# EAGLE board adc_dac (EAGLE 7.3.0), part 1 of 2
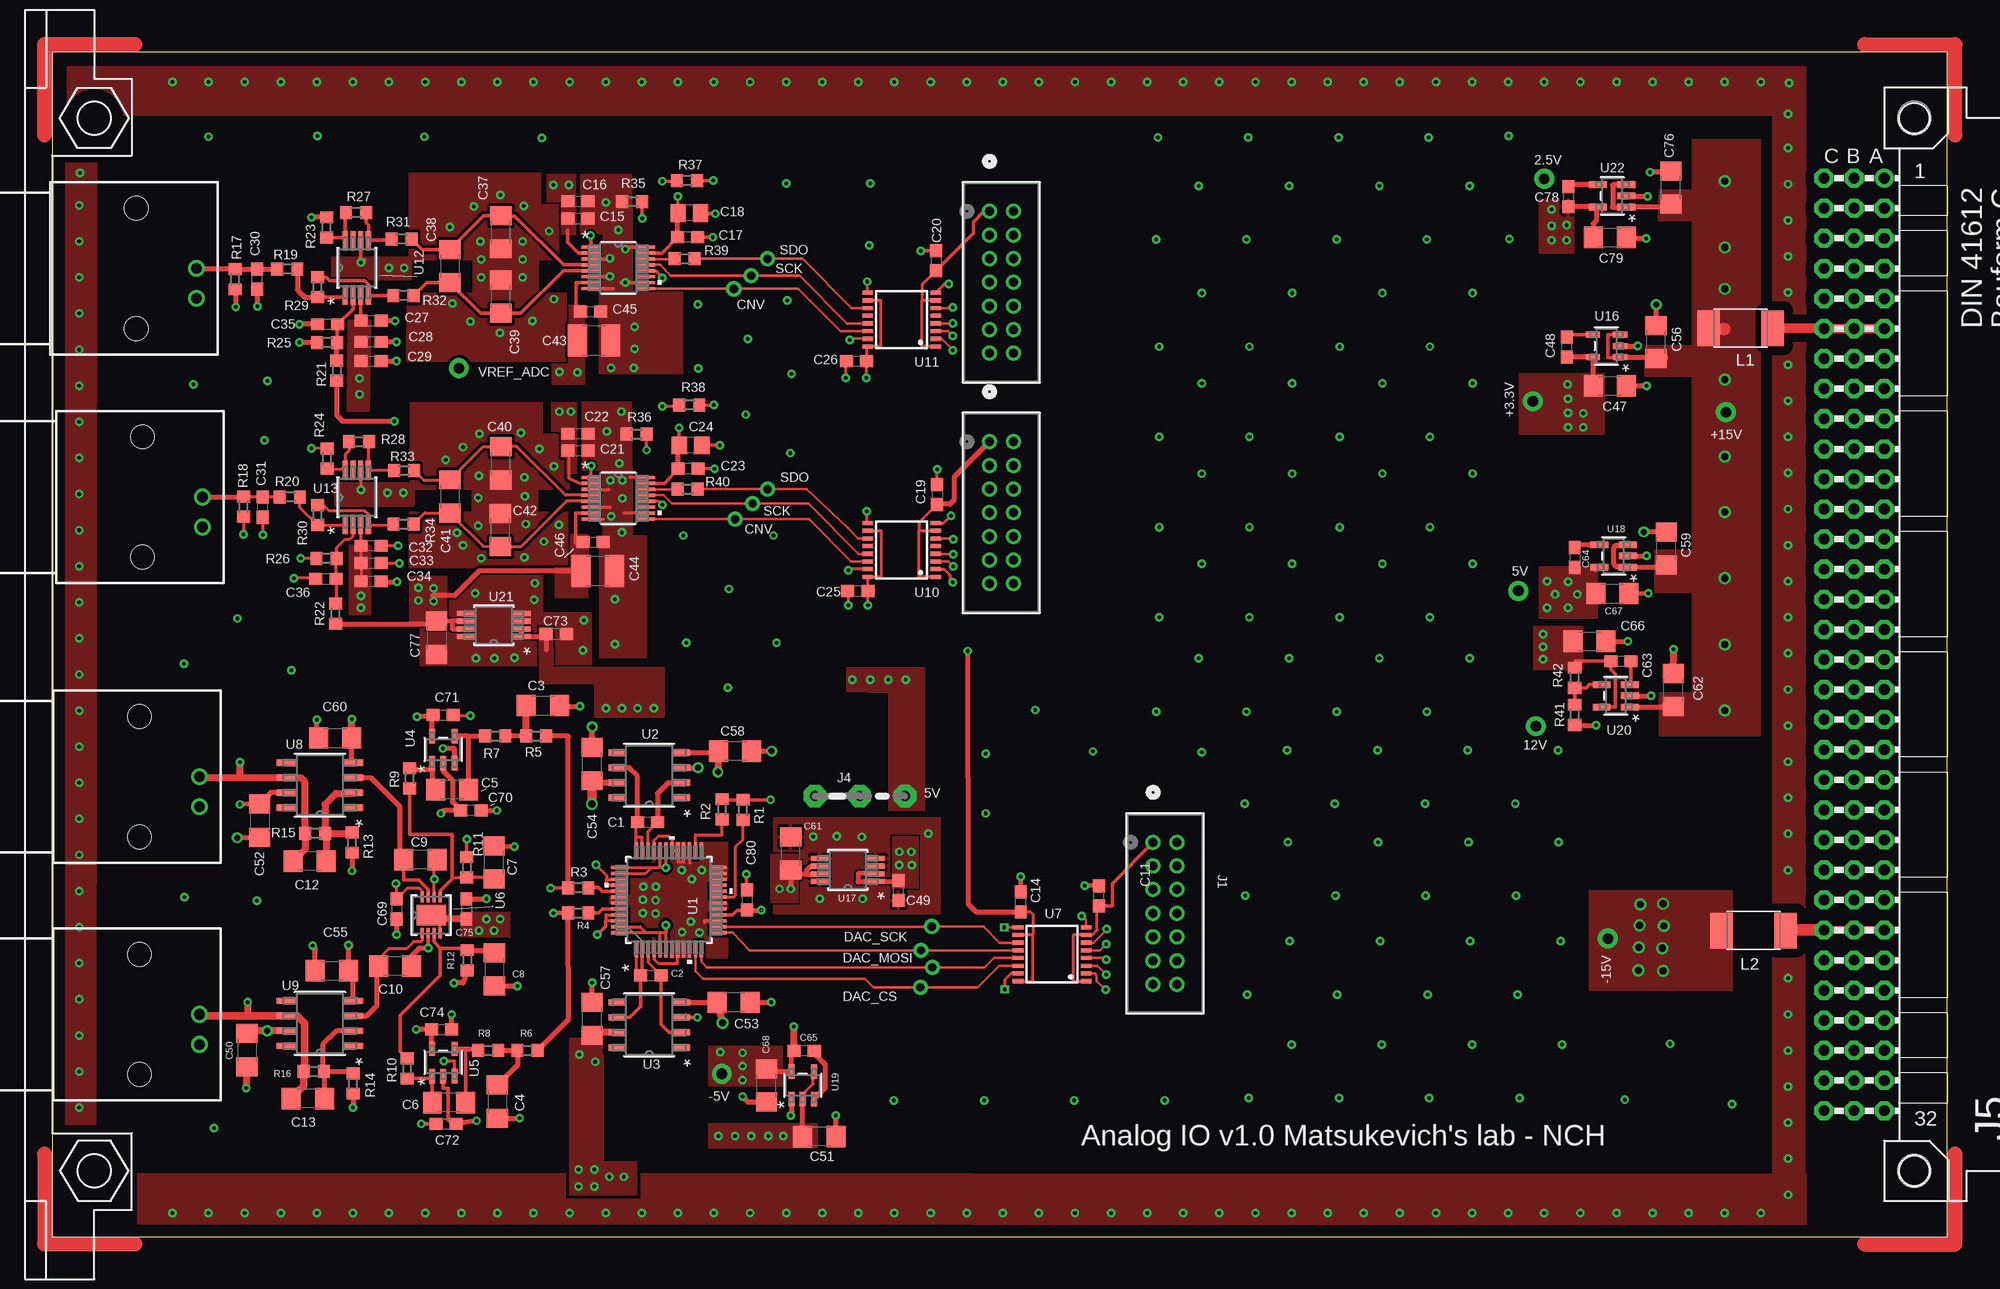
[diagram p0: board, top side]
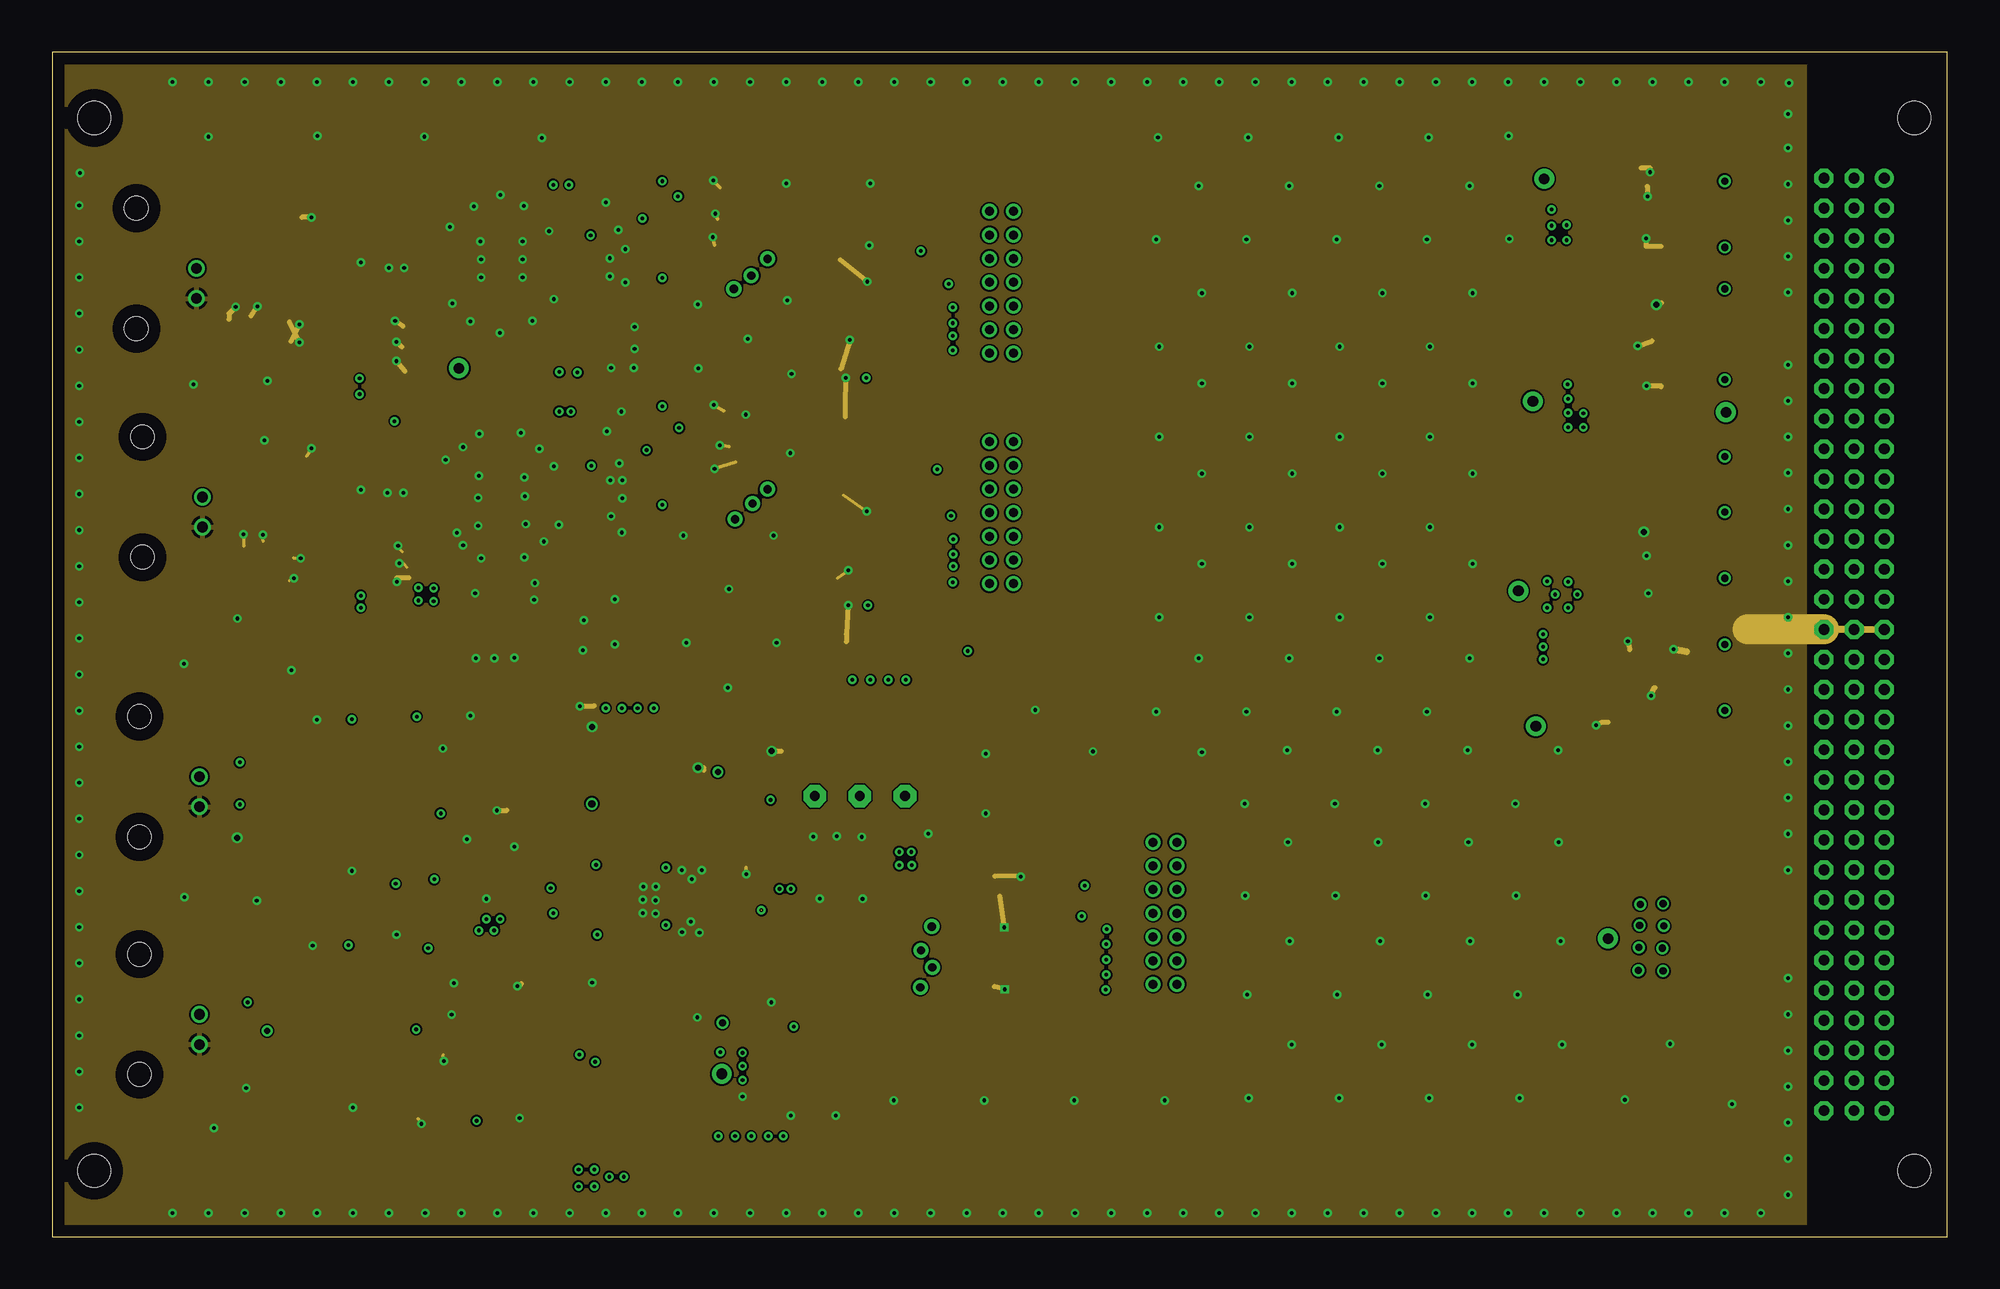
[diagram p1: board, inner layer GND]
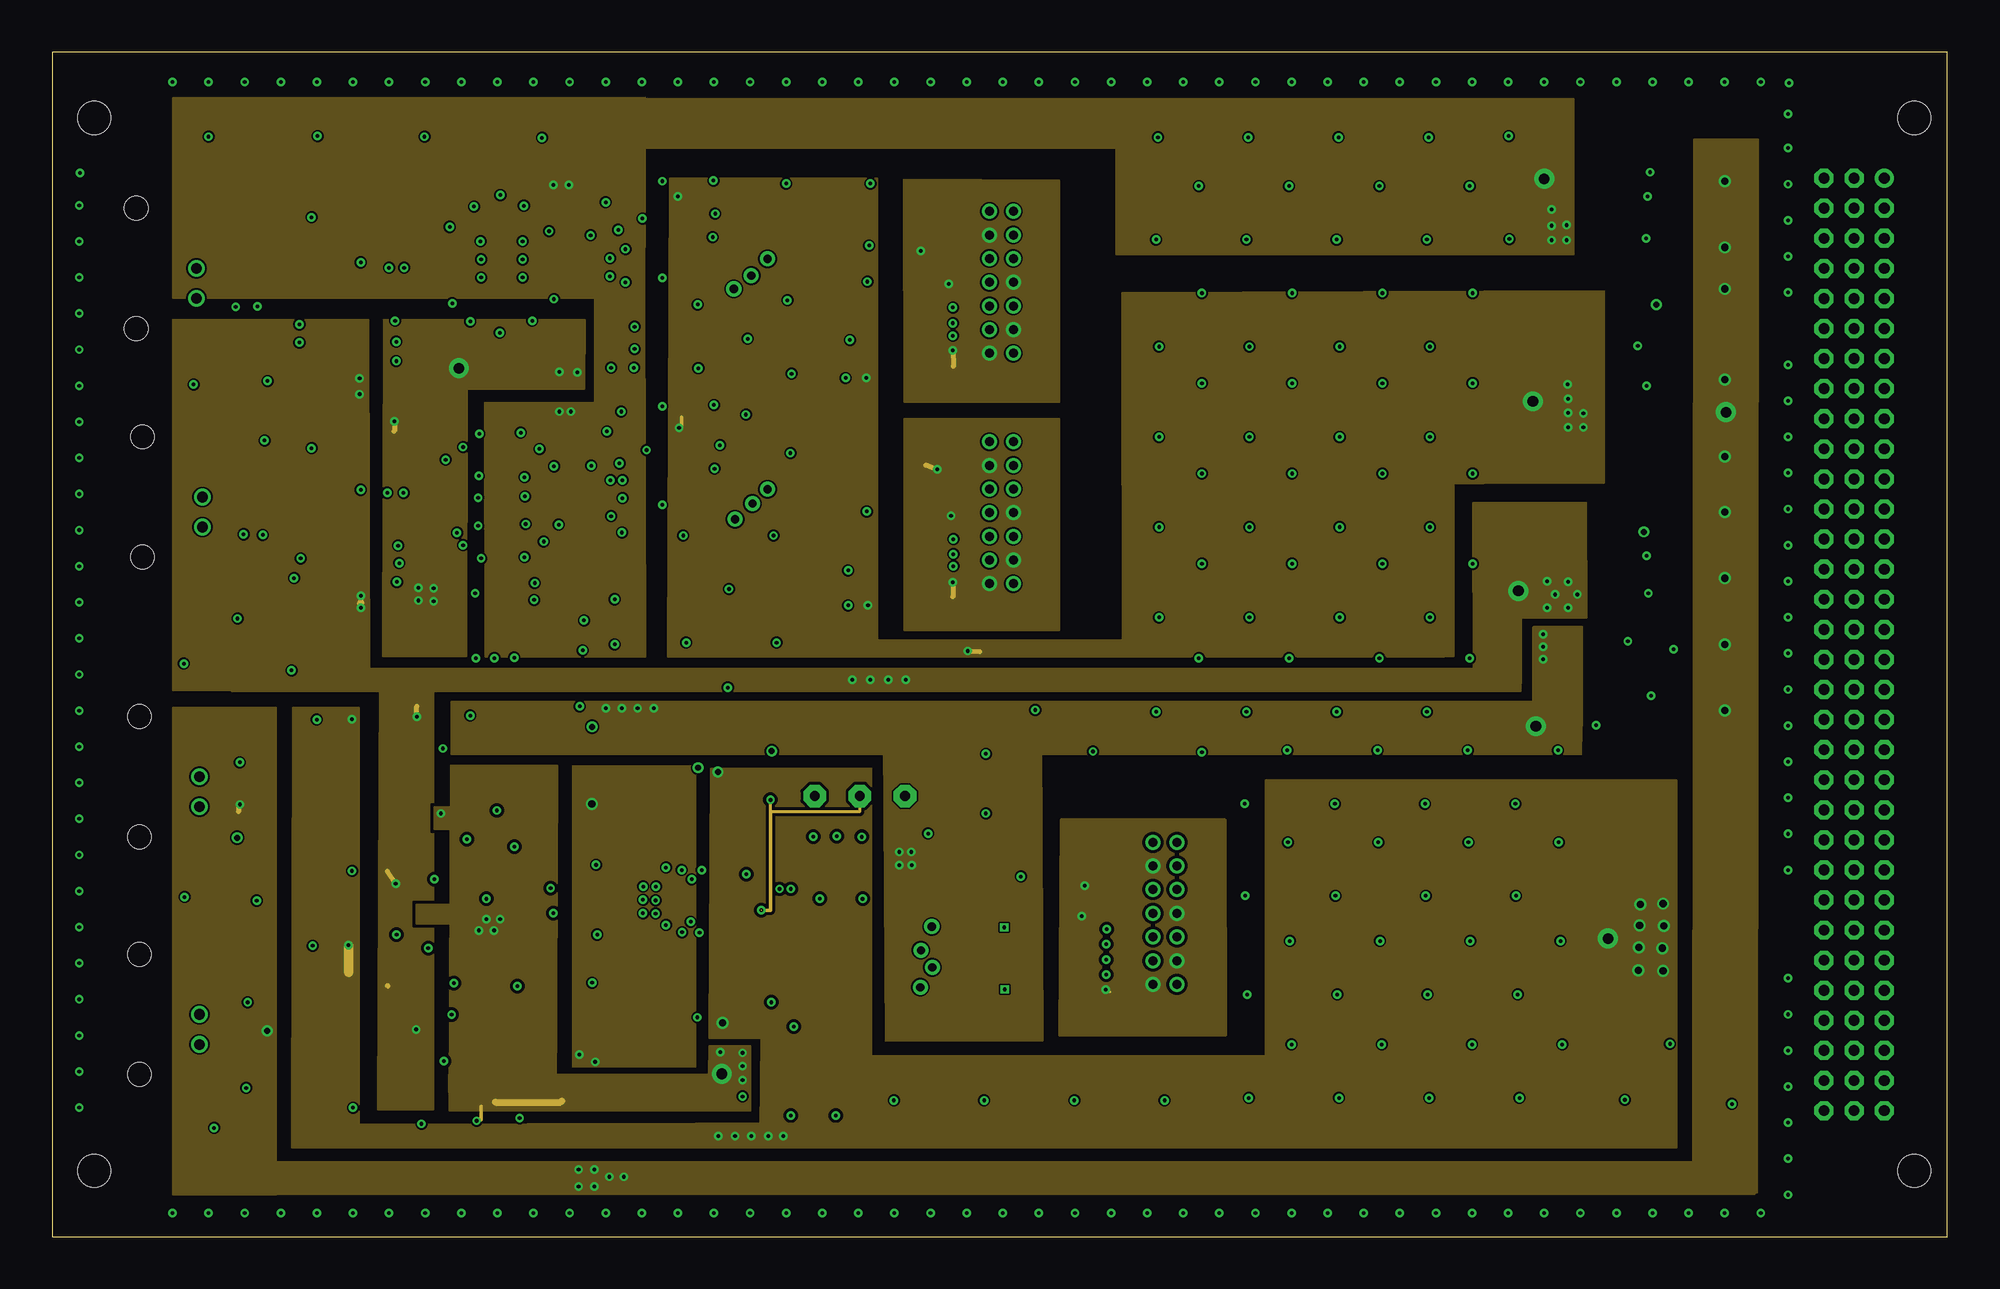
[diagram p2: board, inner layer PWR]
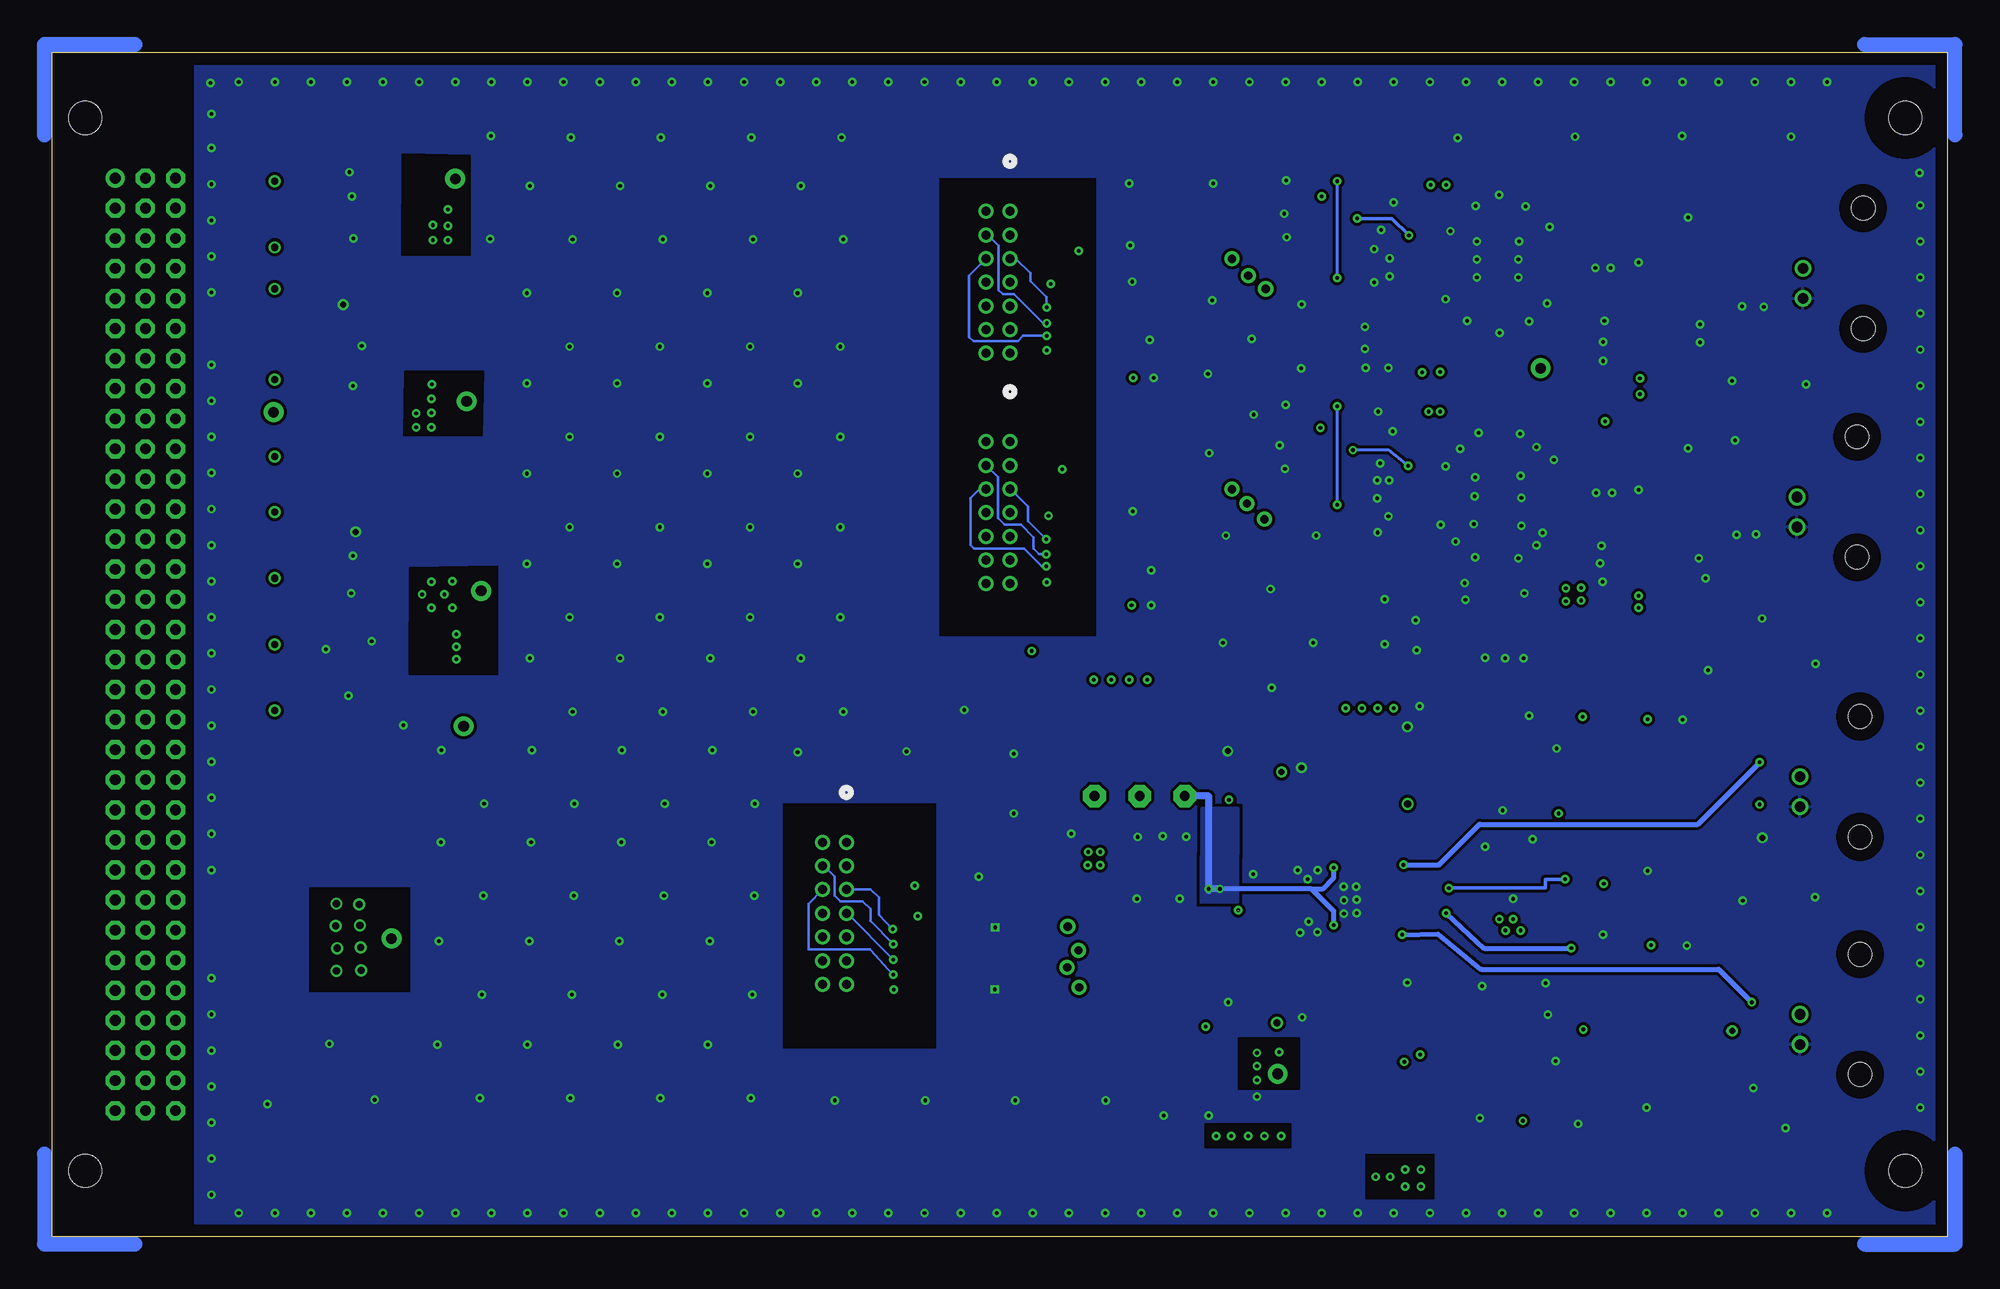
[diagram p3: board, bottom side, seen from below]

Size 160.02 x 100.03 mm. Coordinates in mm from the lower left corner, seen from the top.
Copper layers (1+2*15+16): Top 0.035mm / dielectric 0.10998125mm / GND 0.035mm / dielectric 1.206mm / PWR 0.035mm / dielectric 0.10998125mm / Bottom 0.035mm
Design rules "default *": minimum track width 6mil, minimum drill 8mil, track to track 6mil, track to pad 6mil, pad to pad 6mil, via to via 6mil, smd to smd 6mil, copper to edge 40mil, drill to drill 6mil, minimum pad ring 10mil, minimum via ring 8mil, stop-mask expansion 4mil, vias tented up to drill 0mil, thermal gap 10mil
Net classes: 0 default: drill 0.305 mm

## Footprints (pad centres in the part's own frame; a part is rotated, then mirrored left to right if it is on the bottom)
C0603 = smd 1.1 x 1: 1 -0.85,0; 2 0.85,0
C1206 = smd 1.6 x 1.8: 1 -1.4,0; 2 1.4,0
C0805 = smd 1.3 x 1.5: 1 -0.95,0; 2 0.95,0
C1210 = smd 1.6 x 2.7: 1 -1.4,0; 2 1.4,0
CONN_87831-1420_MOL = drill 0.762 pad 1.27: 1 0,0; 2 2.007,0; 3 3.988,0; 4 5.994,0; 5 8.001,0; 6 10.008,0; 7 11.989,0; 8 0,2.007; 9 2.007,2.007; 10 3.988,2.007; 11 5.994,2.007; 12 8.001,2.007; 13 10.008,2.007; 14 11.989,2.007
04C = drill 0.813 pad 1.905 octagon: 1 -1.905,0; 2 1.905,0; 3 5.715,0
VG96P = drill 0.914 pad 1.6: A1 154.94,39.37 | drill 0.914 pad 1.6 octagon: A2 154.94,36.83; A3 154.94,34.29; A4 154.94,31.75; A5 154.94,29.21; A6 154.94,26.67; A7 154.94,24.13; A8 154.94,21.59; A9 154.94,19.05; A10 154.94,16.51; A11 154.94,13.97; A12 154.94,11.43; A13 154.94,8.89; A14 154.94,6.35; A15 154.94,3.81; A16 154.94,1.27; A17 154.94,-1.27; A18 154.94,-3.81; A19 154.94,-6.35; A20 154.94,-8.89; A21 154.94,-11.43; A22 154.94,-13.97; A23 154.94,-16.51; A24 154.94,-19.05; A25 154.94,-21.59; A26 154.94,-24.13; A27 154.94,-26.67; A28 154.94,-29.21; A29 154.94,-31.75; A30 154.94,-34.29; A31 154.94,-36.83; A32 154.94,-39.37; B1 152.4,39.37; B2 152.4,36.83; B3 152.4,34.29; B4 152.4,31.75; B5 152.4,29.21; B6 152.4,26.67; B7 152.4,24.13; B8 152.4,21.59; B9 152.4,19.05; B10 152.4,16.51; B11 152.4,13.97; B12 152.4,11.43; B13 152.4,8.89; B14 152.4,6.35; B15 152.4,3.81; B16 152.4,1.27; B17 152.4,-1.27; B18 152.4,-3.81; B19 152.4,-6.35; B20 152.4,-8.89; B21 152.4,-11.43; B22 152.4,-13.97; B23 152.4,-16.51; B24 152.4,-19.05; B25 152.4,-21.59; B26 152.4,-24.13; B27 152.4,-26.67; B28 152.4,-29.21; B29 152.4,-31.75; B30 152.4,-34.29; B31 152.4,-36.83; B32 152.4,-39.37; C1 149.86,39.37; C2 149.86,36.83; C3 149.86,34.29; C4 149.86,31.75; C5 149.86,29.21; C6 149.86,26.67; C7 149.86,24.13; C8 149.86,21.59; C9 149.86,19.05; C10 149.86,16.51; C11 149.86,13.97; C12 149.86,11.43; C13 149.86,8.89; C14 149.86,6.35; C15 149.86,3.81; C16 149.86,1.27; C17 149.86,-1.27; C18 149.86,-3.81; C19 149.86,-6.35; C20 149.86,-8.89; C21 149.86,-11.43; C22 149.86,-13.97; C23 149.86,-16.51; C24 149.86,-19.05; C25 149.86,-21.59; C26 149.86,-24.13; C27 149.86,-26.67; C28 149.86,-29.21; C29 149.86,-31.75; C30 149.86,-34.29; C31 149.86,-36.83; C32 149.86,-39.37 | hole 2.794: 3.81,44.45; 3.81,-44.45; 157.48,44.45; 157.48,-44.45
WE-CBF_1812(W=7.3) = smd 1.9 x 3: 1 -2.7,0; 2 2.7,0
R0603 = smd 1 x 1.1: 1 -0.85,0; 2 0.85,0
LQFP-48_LX_LIT = smd 1.356 x 0.27: 1 -4.178,2.75; 2 -4.178,2.25; 3 -4.178,1.75; 4 -4.178,1.25; 5 -4.178,0.75; 6 -4.178,0.25; 7 -4.178,-0.25; 8 -4.178,-0.75; 9 -4.178,-1.25; 10 -4.178,-1.75; 11 -4.178,-2.25; 12 -4.178,-2.75; 25 4.178,-2.75; 26 4.178,-2.25; 27 4.178,-1.75; 28 4.178,-1.25; 29 4.178,-0.75; 30 4.178,-0.25; 31 4.178,0.25; 32 4.178,0.75; 33 4.178,1.25; 34 4.178,1.75; 35 4.178,2.25; 36 4.178,2.75 | smd 0.27 x 1.356: 13 -2.75,-4.178; 14 -2.25,-4.178; 15 -1.75,-4.178; 16 -1.25,-4.178; 17 -0.75,-4.178; 18 -0.25,-4.178; 19 0.25,-4.178; 20 0.75,-4.178; 21 1.25,-4.178; 22 1.75,-4.178; 23 2.25,-4.178; 24 2.75,-4.178; 37 2.75,4.178; 38 2.25,4.178; 39 1.75,4.178; 40 1.25,4.178; 41 0.75,4.178; 42 0.25,4.178; 43 -0.25,4.178; 44 -0.75,4.178; 45 -1.25,4.178; 46 -1.75,4.178; 47 -2.25,4.178; 48 -2.75,4.178
SO-8_S_LIT = smd 1.46 x 0.533: 1 -2.724,1.905; 2 -2.724,0.635; 3 -2.724,-0.635; 4 -2.724,-1.905; 5 2.724,-1.905; 6 2.724,-0.635; 7 2.724,0.635; 8 2.724,1.905
SOT-5_S_LIT = smd 1.211 x 0.501: 1 -1.15,0.95; 2 -1.15,0; 3 -1.15,-0.95; 4 1.15,-0.95; 5 1.15,0.95
DFN-8_DD_LIT-M = smd 0.889 x 0.254: 1 -1.511,0.75; 2 -1.511,0.25; 3 -1.511,-0.25; 4 -1.511,-0.75; 5 1.511,-0.75; 6 1.511,-0.25; 7 1.511,0.25; 8 1.511,0.75 | smd 1.753 x 2.489: 9 0,0
TSSOP16 = smd 0.9 x 0.35: 1 -2.875,2.275; 2 -2.875,1.625; 3 -2.875,0.975; 4 -2.875,0.325; 5 -2.875,-0.325; 6 -2.875,-0.975; 7 -2.875,-1.625; 8 -2.875,-2.275; 9 2.875,-2.275; 10 2.875,-1.625; 11 2.875,-0.975; 12 2.875,-0.325; 13 2.875,0.325; 14 2.875,0.975; 15 2.875,1.625; 16 2.875,2.275
SO-8_S_LIT-M = smd 1.664 x 0.533: 1 -2.826,1.905; 2 -2.826,0.635; 3 -2.826,-0.635; 4 -2.826,-1.905; 5 2.826,-1.905; 6 2.826,-0.635; 7 2.826,0.635; 8 2.826,1.905
MSOP-8_MS_LIT-M = smd 1.562 x 0.432: 1 -2.33,0.975; 2 -2.33,0.325; 3 -2.33,-0.325; 4 -2.33,-0.975; 5 2.33,-0.975; 6 2.33,-0.325; 7 2.33,0.325; 8 2.33,0.975
MSOP-16_MS_LIT-M = smd 1.537 x 0.279: 1 -2.318,1.751; 2 -2.318,1.251; 3 -2.318,0.751; 4 -2.318,0.25; 5 -2.318,-0.25; 6 -2.318,-0.751; 7 -2.318,-1.251; 8 -2.318,-1.751; 9 2.318,-1.751; 10 2.318,-1.251; 11 2.318,-0.751; 12 2.318,-0.25; 13 2.318,0.25; 14 2.318,0.751; 15 2.318,1.251; 16 2.318,1.751
SOT-5_S_LIT-M = smd 1.516 x 0.552: 1 -1.201,0.95; 2 -1.201,0; 3 -1.201,-0.95; 4 1.201,-0.95; 5 1.201,0.95
AMP_227161 = drill 0.9 pad 1.27: 1 0,-5.08; 2 -2.54,-5.08 | hole 2: -5.08,0; 5.08,0

## Placement (x,y rotation side)
C1  100pF  [C0603]  50.27,35 180 top
C2  100pF  [C0603]  50.55,22.07 0 top
C3  1uF  [C1206]  41.43,44.86 0 top
C4  1uF  [C1206]  37.59,11.4 270 top
C5  1uF  [C1206]  33.78,37.74 180 top
C6  1uF  [C1206]  33.5,11.33 180 top
C7  opt  [C1206]  37.31,31.6 90 top
C8  opt  [C1206]  37.34,22.58 270 top
C9  100pF  [C1206]  31.09,31.83 180 top
C10  100pF  [C1206]  28.96,22.83 180 top
C11  100nF  [C0603]  88.39,28.78 90 top
C12  33pF  [C1206]  21.74,31.7 180 top
C13  33pF  [C1206]  21.59,11.66 180 top
C14  100nF  [C0603]  81.79,28.27 90 top
C15  100nF  [C0603]  44.4,85.98 0 top
C16  10uF  [C0603]  44.4,87.45 0 top
C17  100nF  [C0603]  53.64,84.4 180 top
C18  10uF  [C0805]  53.8,86.44 180 top
C19  100nF  [C0603]  74.73,62.66 270 top
C20  100nF  [C0603]  74.63,82.42 270 top
C21  100nF  [C0603]  44.4,66.37 0 top
C22  10uF  [C0603]  44.4,67.79 0 top
C23  100nF  [C0603]  53.7,64.85 180 top
C24  10uF  [C0805]  53.9,66.83 180 top
C25  100nF  [C0603]  68.02,54.53 0 top
C26  100nF  [C0603]  67.92,73.94 0 top
C27  10nF  [C0603]  26.92,77.34 0 top
C28  100nF  [C0603]  26.92,75.56 0 top
C29  4.7uF  [C0603]  26.92,73.94 0 top
C30  OPT  [C0603]  17.32,80.85 90 top
C31  OPT  [C0603]  17.78,61.59 90 top
C32  10nF  [C0603]  26.92,58.34 0 top
C33  100nF  [C0603]  26.92,56.87 0 top
C34  4.7uF  [C0603]  26.92,55.35 0 top
C35  10uF  [C0603]  23.27,77.04 0 top
C36  10uF  [C0603]  23.11,55.55 0 top
C37  6.8nF  [C1206]  37.9,84.81 90 top
C38  3.3nF  [C1206]  33.58,81.97 270 top
C39  6.8nF  [C1206]  37.9,79.38 90 top
C40  6.8nF  [C1206]  37.9,65.3 90 top
C41  3.3nF  [C1206]  33.58,62.51 270 top
C42  6.8nF  [C1206]  37.85,59.66 90 top
C43  47uF  [C1210]  45.77,75.67 0 top
C44  47uF  [C1210]  46.08,56.21 0 top
C45  100nF  [C0603]  45.47,78.11 0 top
C46  100nF  [C0603]  45.67,58.65 0 top
C47  10uF  [C1206]  131.52,71.86 0 top
C48  10nF  [C0603]  127.89,75.11 90 top
C49  100nF  [C0603]  71.48,29.24 90 top
C50  10uF  [C1206]  16.43,15.75 270 top
C51  10uF  [C1206]  64.77,8.46 180 top
C52  10uF  [C1206]  17.53,35.13 270 top
C53  10uF  [C1206]  57.53,19.79 180 top
C54  10uF  [C1206]  45.59,39.9 90 top
C55  10uF  [C1206]  23.62,22.45 0 top
C56  10uF  [C1206]  135.43,75.54 90 top
C57  10uF  [C1206]  45.59,18.39 90 top
C58  10uF  [C1206]  57.66,41 180 top
C59  10uF  [C1206]  136.3,58.12 90 top
C60  10uF  [C1206]  23.9,42.11 0 top
C61  10uF  [C1206]  62.36,32.36 90 top
C62  10uF  [C1206]  136.88,46.15 90 top
C63  10nF  [C0603]  132.46,48.59 180 top
C64  10nF  [C0603]  128.55,57.35 270 top
C65  10nF  [C0603]  63.5,15.7 180 top
C66  10uF  [C1206]  129.79,50.27 0 top
C67  10uF  [C1206]  131.72,54.31 0 top
C68  10uF  [C1206]  60.33,12.78 90 top
C69  100nF  [C0603]  29.08,27.66 270 top
C70  100nF  [C0603]  35.36,35.99 180 top
C71  100nF  [C0603]  33.02,44.04 0 top
C72  100nF  [C0603]  33.27,9.52 0 top
C73  100nF  [C0603]  42.57,50.88 180 top
C74  100nF  [C0603]  32.89,17.5 0 top
C75  100nF  [C0603]  34.98,27.69 270 top
C76  10uF  [C1206]  136.68,88.57 90 top
C77  10uF  [C1206]  32.46,50.57 270 top
C78  10nF  [C0603]  128.02,87.83 270 top
C79  10uF  [C1206]  131.52,84.38 0 top
C80  100nF  [C0603]  58.67,28.42 270 top
J1  87831-1420  [CONN_87831-1420_MOL]  92.96,33.3 270 top
J2  87831-1420  [CONN_87831-1420_MOL]  79.15,67.13 270 top
J3  87831-1420  [CONN_87831-1420_MOL]  79.15,86.59 270 top
J4  [04C]  66.29,37.21 0 top
J5  [VG96P]  -0.25,50.01 0 top
L1  [WE-CBF_1812(W=7.3)]  142.57,76.71 180 top
L2  [WE-CBF_1812(W=7.3)]  143.66,25.86 180 top
R1  10k  [R0603]  58.32,36.04 270 top
R2  10k  [R0603]  56.57,36.09 270 top
R3  1k  [R0603]  44.42,29.46 180 top
R4  1k  [R0603]  44.42,27.33 0 top
R5  10k  [R0603]  40.87,42.27 180 top
R6  10k  [R0603]  40.13,15.72 0 top
R7  10k  [R0603]  37.41,42.27 180 top
R8  10k  [R0603]  36.83,15.72 0 top
R9  1k  [R0603]  30.18,38.71 270 top
R10  1k  [R0603]  29.97,14.2 90 top
R11  10  [R0603]  35,31.19 270 top
R12  10  [R0603]  35.05,23.34 90 top
R13  1k  [R0603]  25.32,33.27 270 top
R14  1k  [R0603]  25.4,12.93 270 top
R15  4.02k  [R0603]  22.2,34.06 180 top
R16  4.02k  [R0603]  22.1,13.94 180 top
R17  OPT  [R0603]  15.44,80.85 270 top
R18  OPT  [R0603]  16.15,61.65 270 top
R19  1k  [R0603]  19.86,81.71 180 top
R20  1k  [R0603]  20.07,62.46 180 top
R21  1k  [R0603]  24.03,73.13 270 top
R22  1k  [R0603]  23.93,52.6 270 top
R23  1k  [R0603]  23.16,85.22 90 top
R24  1k  [R0603]  23.22,65.71 90 top
R25  1k  [R0603]  23.22,75.51 180 top
R26  1k  [R0603]  23.16,57.28 180 top
R27  333  [R0603]  25.65,86.49 0 top
R28  333  [R0603]  25.91,67.13 0 top
R29  333  [R0603]  22.4,80.19 270 top
R30  333  [R0603]  22.4,60.93 270 top
R31  35.7  [R0603]  29.51,84.25 180 top
R32  35.7  [R0603]  29.67,79.48 180 top
R33  35.7  [R0603]  29.72,64.69 180 top
R34  35.7  [R0603]  29.67,60.17 180 top
R35  1k  [R0603]  48.97,87.4 0 top
R36  1k  [R0603]  49.35,67.77 0 top
R37  1k  [R0603]  53.59,89.18 0 top
R38  1k  [R0603]  53.8,70.23 0 top
R39  33  [R0603]  53.39,82.58 180 top
R40  33  [R0603]  53.64,63.12 180 top
R41  10k  [R0603]  128.55,44.07 270 top
R42  88.7K  [R0603]  128.55,47.19 90 top
U1  LTC2758ACLXPBF  [LQFP-48_LX_LIT]  52.07,28.42 90 top
U2  LT1012S8PBF  [SO-8_S_LIT]  50.42,38.96 180 top
U3  LT1012S8PBF  [SO-8_S_LIT]  50.42,17.88 180 top
U4  LTC2054CS5  [SOT-5_S_LIT]  33.02,41.12 90 top
U5  LTC2054CS5  [SOT-5_S_LIT]  33.02,14.71 90 top
U6  LTC6244HVIDDPBFDFN-8_DD_LIT-M  [DFN-8_DD_LIT-M]  32,27.15 90 top
U7  MAX14431CAEE+TSSOP16  [TSSOP16]  84.43,23.85 180 top
U8  LT1360CS8TRPBFSO-8_S_LIT-M  [SO-8_S_LIT-M]  22.61,38.13 180 top
U9  LT1360CS8TRPBFSO-8_S_LIT-M  [SO-8_S_LIT-M]  22.61,18.01 180 top
U10  MAX14431CAEE+TSSOP16  [TSSOP16]  71.73,57.99 180 top
U11  MAX14431CAEE+TSSOP16  [TSSOP16]  71.73,77.44 180 top
U12  LTC6362CMS8PBFMSOP-8_MS_LIT-M  [MSOP-8_MS_LIT-M]  25.73,81.81 90 top
U13  LTC6362CMS8PBFMSOP-8_MS_LIT-M  [MSOP-8_MS_LIT-M]  25.73,62.43 90 top
U14  LTC2380CMS-16PBFMSOP-16_MS_LIT-M  [MSOP-16_MS_LIT-M]  47.8,81.81 0 top
U15  LTC2380CMS-16PBFMSOP-16_MS_LIT-M  [MSOP-16_MS_LIT-M]  47.8,62.36 0 top
U16  LT1761ES5-3.3PBF  [SOT-5_S_LIT]  131.24,75.21 180 top
U17  LTC6655CHMS8-5PBFMSOP-8_MS_LIT-M  [MSOP-8_MS_LIT-M]  67.18,30.96 180 top
U18  LT1761ES5-5TRMPBFSOT-5_S_LIT-M  [SOT-5_S_LIT-M]  131.85,57.48 180 top
U19  LT1964ES5-5TRMPBF  [SOT-5_S_LIT]  63.37,12.78 90 top
U20  LT1761ES5-BYPPBFSOT-5_S_LIT-M  [SOT-5_S_LIT-M]  132.03,45.67 180 top
U21  LTC6655CHMS8-5PBFMSOP-8_MS_LIT-M  [MSOP-8_MS_LIT-M]  37.29,51.64 180 top
U22  LT1761ES5-2.5_TRMPBFSOT-5_S_LIT-M  [SOT-5_S_LIT-M]  131.72,87.88 180 top
X1  1-227161-0  [AMP_227161]  7.37,38.84 90 top
X2  1-227161-0  [AMP_227161]  7.37,18.77 90 top
X3  1-227161-0  [AMP_227161]  7.11,81.76 90 top
X4  1-227161-0  [AMP_227161]  7.62,62.46 90 top

## Library data of the parts
C1 C2 = rcl; PARTNO: 06035A101JAT2A
C3-C6 = rcl; PARTNO: 1206YC105KAT2A
C7 C8 R17 R18 = rcl; PARTNO: *
C9 C10 = rcl; PARTNO: 12065A101KAT2A
C11 C14 C15 C17 C19-C21 C23 C25 C26 C28 C33 C45 C46 = chihuan; PARTNO: 0603YC104K4T4A
C12 C13 = rcl; PARTNO: 12065A330KAT2A
C16 C22 C35 C36 = chihuan; PARTNO: GRM188R61E106KA73J
C18 C24 = chihuan; PARTNO: 08053D106MAT2A
C27 C32 = chihuan; PARTNO: 0603YC103KAT4A
C29 C34 = chihuan; PARTNO: 06036D475KAT4A
C30 C31 = chihuan; PARTNO: *
C37 C39 C40 C42 = chihuan; PARTNO: 1206AC682KAZ1A
C38 C41 = chihuan; PARTNO: 12065A332JAT2A
C43 C44 = chihuan; PARTNO: GRM32ER71A476KE15L
C47 C50-C62 C66-C68 C76 C77 C79 = rcl; PARTNO: 12063D106KAT2A
C48 C63-C65 C78 = rcl; PARTNO: 0603YC103KAT4A
C49 C69-C75 C80 = rcl; PARTNO: 0603YC104K4T4A
J1-J3 = custom_dzmitry; COPYRIGHT: Copyright (C) 2018 Accelerated Designs. All rights reserved; MANUFACTURER_PART_NUMBER: 87831-1420; PARTNO: 878311420; SOURCELIBRARY: Molex_2012-01-01_87831; VENDOR: Molex Connector Corporation
J4 = jumper; PARTNO: 87224-3
J5 = 19inch; PARTNO: 650473-5
L1 L2 = chihuan; PARTNO: 742792514
R1 R2 R5-R8 R41 = rcl; PARTNO: RT0603DRD0710KL
R3 R4 R9 R10 R13 R14 R19-R26 R35-R38 = rcl; PARTNO: RT0603BRD071KL
R11 R12 = rcl; PARTNO: RT0603BRD0710RL
R15 R16 = rcl; PARTNO: RT0603DRD074K02L
R27-R30 = rcl; PARTNO: RT0603BRD07332RL
R31-R34 = rcl; PARTNO: RT0603DRE0735R7L
R39 R40 = rcl; PARTNO: RT0603DRD0733RL
R42 = rcl; PARTNO: RT0603BRD0788K7L
U1 = custom_dzmitry; BUILT_BY: EMA_UL_Team; MANUFACTURER_PART_NUMBER: LTC2758ACLX#PBF; PARTNO: LTC2758BILX#PBF; SOURCELIBRARY: LinearTech_2016-05-13_5; VENDOR: Linear Technology
U2 U3 = custom_dzmitry; BUILT_BY: EMA_UL_Team; MANUFACTURER_PART_NUMBER: LT1012S8#PBF; PARTNO: LT1012S8#PBF; SOURCELIBRARY: LinearTech_2016-05-13_9; VENDOR: Linear Technology
U4 U5 = custom_dzmitry; BUILT_BY: EMA_UL_Team; MANUFACTURER_PART_NUMBER: LTC2054CS5; PARTNO: LTC2054CS5#TRPBF; SOURCELIBRARY: LinearTech_2011-12-07; VENDOR: Linear Technology
U6 = custom_dzmitry; BUILT_BY: EMA_UL_Team; MANUFACTURER_PART_NUMBER: LTC6244HVIDD#PBF; PARTNO: LTC6244HVIDD#PBF; SOURCELIBRARY: LinearTech_2016-05-13_1; VENDOR: Linear Technology
U7 U10 U11 = chihuan; PARTNO: MAX14431CAEE+
U8 U9 = custom_dzmitry; BUILT_BY: EMA_UL_Team; MANUFACTURER_PART_NUMBER: LT1360CS8#TRPBF; PARTNO: LT1360CS8#TRPBF; SOURCELIBRARY: LinearTech_2016-05-13_8; VENDOR: Linear Technology
U12 U13 = chihuan; BUILT_BY: EMA_UL_Team; MANUFACTURER_PART_NUMBER: LTC6362CMS8#PBF; PARTNO: LTC6362CMS8#PBF; SOURCELIBRARY: LinearTech_2016-05-13_6; VENDOR: Linear Technology
U14 U15 = chihuan; BUILT_BY: EMA_UL_Team; MANUFACTURER_PART_NUMBER: LTC2380CMS-16#PBF; PARTNO: LTC2380CMS-24#PBF; SOURCELIBRARY: LinearTech_2016-05-13_4; VENDOR: Linear Technology
U16 = custom_dzmitry; BUILT_BY: EMA_UL_Team; MANUFACTURER_PART_NUMBER: LT1761ES5-3.3#PBF; PARTNO: LT1761ES5-3.3#TRPBF; SOURCELIBRARY: LinearTech_2016-05-13_9; VENDOR: Linear Technology
U17 U21 = custom_dzmitry; BUILT_BY: EMA_UL_Team; MANUFACTURER_PART_NUMBER: LTC6655CHMS8-5#PBF; PARTNO: LTC6655CHMS8-5#PBF; SOURCELIBRARY: LinearTech_2016-05-13_4; VENDOR: Linear Technology
U18 = chihuan; BUILT_BY: EMA_UL_Team; MANUFACTURER_PART_NUMBER: LT1761ES5-5#TRMPBF; PARTNO: LT1761ES5-5#TRMPBF; SOURCELIBRARY: LinearTech_2016_03_08; VENDOR: Linear Technology
U19 = custom_dzmitry; BUILT_BY: EMA_UL_Team; MANUFACTURER_PART_NUMBER: LT1964ES5-5#TRMPBF; PARTNO: LT1964ES5-5#TRMPBF; SOURCELIBRARY: LinearTech_2016_03_08; VENDOR: Linear Technology
U20 = chihuan; BUILT_BY: EMA_UL_Team; MANUFACTURER_PART_NUMBER: LT1761ES5-BYP#PBF; PARTNO: LT1761ES5-BYP#TRMPBF; SOURCELIBRARY: LinearTech_2016-05-13_9; VENDOR: Linear Technology
U22 = chihuan; BUILT_BY: EMA_UL_Team; MANUFACTURER_PART_NUMBER: LT1761ES5-5#TRMPBF; PARTNO: LT1761ES5-2.5#TRMPBF; SOURCELIBRARY: LinearTech_2016_03_08; VENDOR: Linear Technology
X1-X4 = con-coax; MF: TYCO ELECTRONICS; MPN: 1-227161; OC_FARNELL: unknown; OC_NEWARK: 33B3200; PARTNO: 31-5431

## Nets
$RFBA: C13.2 R16.2 U1.45 U1.46 U9.6 X2.1
+2.5V: C15.1 C16.1 C21.1 C22.1 C78.2 C79.1 U14.2 U15.2 U22.5
+3.3V: C14.1 C17.2 C18.2 C23.2 C24.2 C25.2 C26.2 C47.1 C48.1 U7.10 U7.16 U10.10 U10.16 U11.10 U11.16 U14.15 U15.15 U16.5
+5V: C27.1 C28.1 C29.1 C32.1 C33.1 C34.1 C64.2 C67.1 C69.1 C71.1 C74.1 J4.3 U4.5 U5.5 U6.8 U12.3 U13.3 U18.5
+12V: C49.2 C63.2 C66.1 C73.2 R42.2 U17.1 U17.2 U20.5 U21.1 U21.2
-5V: C65.2 C68.2 C70.2 C72.2 C75.2 U4.2 U5.2 U6.4 U6.9 U19.5
ADC_1_BUSY: U15.11
ADC_1_CNV: U10.14 U15.9
ADC_1_SCK: U10.13 U15.13
ADC_1_SDO: R40.1 U10.11
ADC_2_BUSY: U14.11
ADC_2_CNV: U11.14 U14.9
ADC_2_SCK: U11.13 U14.13
ADC_2_SDO: R39.1 U11.11
CS_ADC1_IN: J2.10 U10.3
CS_ADC2_IN: J3.10 U11.3
CS_DAC_IN: J1.10 U7.3
DAC_CS: U1.11 U7.14
DAC_MISO: U1.14 U7.11
DAC_MOSI: U1.12 U7.13
DAC_SCK: U1.13 U7.12
GND: C3.2 C4.2 C7.2 C8.2 C14.2 C15.2 C16.2 C17.1 C18.1 C21.2 C22.2 C23.1 C24.1 C25.1 C26.1 C27.2 C28.2 C29.2 C30.1 C31.1 C32.2 C33.2 C34.2 C35.1 C36.1 C37.1 C39.2 C40.1 C42.2 C43.2 C44.2 C45.2 C46.2 C47.2 C49.1 C50.2 C51.1 C52.2 C53.1 C54.2 C55.1 C56.2 C57.2 C58.1 C59.2 C60.1 C61.2 C62.2 C66.2 C67.2 C68.1 C69.2 C70.1 C71.2 C72.1 C73.1 C74.2 C75.1 C76.2 C77.2 C79.2 C80.1 J5.A16 J5.B16 J5.C16 R11.1 R12.1 R13.2 R14.2 R17.2 R18.2 R23.2 R24.2 R25.2 R26.2 R35.1 R36.1 R37.2 R38.2 R41.2 U1.4 U1.7 U1.8 U1.9 U1.10 U1.15 U1.17 U1.18 U1.22 U1.23 U1.24 U1.25 U1.27 U1.28 U1.29 U1.30 U1.33 U1.42 U1.43 U2.3 U3.3 U4.3 U5.3 U7.9 U7.15 U10.9 U10.15 U11.9 U11.15 U12.6 U13.6 U14.3 U14.6 U14.8 U14.10 U14.16 U15.3 U15.6 U15.8 U15.10 U15.16 U16.2 U17.3 U17.4 U17.5 U17.8 U18.2 U19.1 U20.2 U21.3 U21.4 U21.5 U21.8 U22.2 X1.2 X2.2 X3.2 X4.2
GNDA: C11.2 J1.2 J1.7 J1.11 J1.13 U7.2 U7.8
GNDA_ADC1: C19.1 J2.2 J2.7 J2.11 J2.13 U10.2 U10.8
GNDA_ADC2: C20.1 J3.2 J3.7 J3.11 J3.13 U11.2 U11.8
LTC6362_OUT+: R30.1 R34.2 U13.4
LTC6362_OUT+1: R29.1 R32.2 U12.4
MISO_ADC1_IN: J2.3 U10.6
MISO_ADC2_IN: J3.3 U11.6
MISO_DAC_IN: J1.3 U7.6
MOSI_ADC1_IN: J2.4
MOSI_ADC2_IN: J3.4
MOSI_ADC_1_IN: U10.5
MOSI_ADC_2_IN: U11.5
MOSI_DAC_IN: J1.4 U7.4
N$1: C2.2 U1.3 U3.2
N$2: C2.1 U1.1 U1.2 U3.6
N$3: R3.1 U1.41
N$4: J5.A6 J5.B6 J5.C6 L1.1
N$5: C1.1 U1.34 U2.2
N$6: C1.2 U1.35 U1.36 U2.6
N$7: C3.1 R5.2 R7.1
N$8: C5.1 R7.2 U4.4
N$9: C5.2 R9.1 U4.1
N$10: C7.1 R9.2 R11.2 U6.5
N$11: C63.1 U20.3
N$12: R41.1 R42.1 U20.4
N$13: R4.2 U1.44
N$14: C12.2 R15.2 U1.39 U1.40 U8.6 X1.1
N$15: C48.2 U16.4
N$16: C4.1 R6.1 R8.2
N$17: C6.1 R8.1 U5.4
N$18: C6.2 R10.1 U5.1
N$19: C8.1 R10.2 R12.2 U6.3
N$20: C13.1 R14.1 R16.1 U9.2
N$21: C10.2 U6.1 U9.3
N$23: R2.2 U1.26
N$24: R1.2 U1.19
N$25: C65.1 U19.3
N$26: J5.A26 J5.B26 J5.C26 L2.1
N$27: C36.2 R22.1 R26.1 U13.2
N$28: C64.1 U18.4
N$29: R40.2 U15.14
N$30: C40.2 C41.1 R33.1 U15.4
N$31: C78.1 U22.4
N$33: R36.2 U15.1
N$34: C41.2 C42.1 R34.1 U15.5
N$35: R28.2 R33.2 U13.5
N$36: R35.2 U14.1
N$37: C31.2 R18.1 R20.2 X4.1
N$38: R20.1 R30.2 U13.1
N$39: R24.1 R28.1 U13.8
N$40: R39.2 U14.14
N$41: R27.2 R31.2 U12.5
N$44: C35.2 R21.1 R25.1 U12.2
N$45: R19.1 R29.2 U12.1
N$46: R23.1 R27.1 U12.8
N$47: C30.2 R17.1 R19.2 X3.1
N$48: C37.2 C38.1 R31.1 U14.4
N$49: C38.2 C39.1 R32.1 U14.5
N$50: R38.1 U15.12
N$51: R37.1 U14.12
SCLK_ADC1_IN: J2.9 U10.4
SCLK_ADC2_IN: J3.9 U11.4
SCLK_DAC_IN: J1.9 U7.5
U6A_2: C10.1 R4.1 R6.2 U6.2
U6B_6: C9.1 R3.2 R5.1 U6.6
U72: C12.1 R13.1 R15.1 U8.2
U73: C9.2 U6.7 U8.3
V+: C50.1 C52.1 C54.1 C56.1 C57.1 C59.1 C62.1 C76.1 L1.2 U2.7 U3.7 U8.7 U9.7 U16.1 U16.3 U18.1 U18.3 U20.1 U22.1 U22.3
V-: C51.2 C53.2 C55.2 C58.2 C60.2 L2.2 U2.4 U3.4 U8.4 U9.4 U19.2 U19.4
VCC: C80.2 J4.2 R1.1 R2.1 U1.16
VDDA: C11.1 J1.1 U7.1 U7.7
VDDA_ADC1: C19.2 J2.1 U10.1 U10.7
VDDA_ADC2: C20.2 J3.1 U11.1 U11.7
VREF: C61.1 J4.1 U1.5 U1.6 U1.31 U1.32 U1.37 U1.38 U1.47 U1.48 U17.6 U17.7
VREF_ADC1: C43.1 C44.1 C45.1 C46.1 C77.1 R21.2 R22.2 U14.7 U15.7 U21.6 U21.7